# EAGLE board B01_IchigojamCap-Y_v1.0 (EAGLE 9.0.0)

Size 100 x 80 mm. Coordinates in mm from the lower left corner, seen from the top.
Outline: 0,0 100,0 100,80 0,80 0,0
Copper layers (1*16): Top 0.035mm / dielectric 1.5mm / Bottom 0.035mm
Design rules "default": minimum track width 6mil, minimum drill 0.35mm, track to track 6mil, track to pad 6mil, pad to pad 6mil, via to via 6mil, smd to smd 6mil, copper to edge 40mil, drill to drill 6mil, minimum pad ring 10mil, minimum via ring 8mil, stop-mask expansion 4mil, vias tented up to drill 0mil, thermal gap 10mil

## Footprints (pad centres in the part's own frame; a part is rotated, then mirrored left to right if it is on the bottom)
255SB = drill 1.118 long: 1 -3.81,0; 2 0,0; 3 3.81,0
MA10-1 = drill 1.016 long: 1 -11.43,0; 2 -8.89,0; 3 -6.35,0; 4 -3.81,0; 5 -1.27,0; 6 1.27,0; 7 3.81,0; 8 6.35,0; 9 8.89,0; 10 11.43,0
61400416021 = drill 0.92: 1 -3.5,2.7; 2 -1,2.7; 3 1,2.7; 4 3.5,2.7 | drill 2.3: 5 -6.57,0; 6 6.57,0

## Placement (x,y rotation side)
S1  [255SB]  55.88,50.8 0 top
SV1  [MA10-1]  55.88,58.42 0 top
USB_LEFT  [61400416021]  45.72,45.72 0 top
USB_RIGHT  61400416021  [61400416021]  66.04,45.72 0 top

## Library data of the parts
S1 = switch
SV1 = con-lstb; OC_FARNELL: unknown; OC_NEWARK: unknown
USB_LEFT USB_RIGHT = USB_Wuerth_Elektronik_eiCan_Communication_Connectors_STENCIL

## Nets
3.3V: S1.1 S1.2 SV1.1 SV1.8 USB_RIGHT.3
GND: SV1.9 SV1.10 USB_RIGHT.4
KBD1: SV1.6 USB_RIGHT.1
KBD2: SV1.2 USB_LEFT.1
OFF: S1.3
SCL: SV1.3 USB_LEFT.2
SDA: SV1.4 USB_LEFT.3
SOUND: SV1.7 USB_RIGHT.2
VIDEO: SV1.5 USB_LEFT.4

## Tracks (layer width: path | path; a pad name or v marks a point on that pad's centre or on a via)
3.3V  (4 unrouted)
GND  (2 unrouted)
KBD1  (1 unrouted)
KBD2  (1 unrouted)
SCL  (1 unrouted)
SDA  (1 unrouted)
SOUND  (1 unrouted)
VIDEO  (1 unrouted)